# Altium PCB 球锁设置板改版20424.PCBDOC
Units mm, origin at the board's own origin, x right, y up, seen from the top; angles counter-clockwise.
Board outline 32 x 7.25 mm, 2 copper layers (Top, Bottom), stack 0.323 mm thick; 5 components, 4 nets, 11 pads, 4 vias.
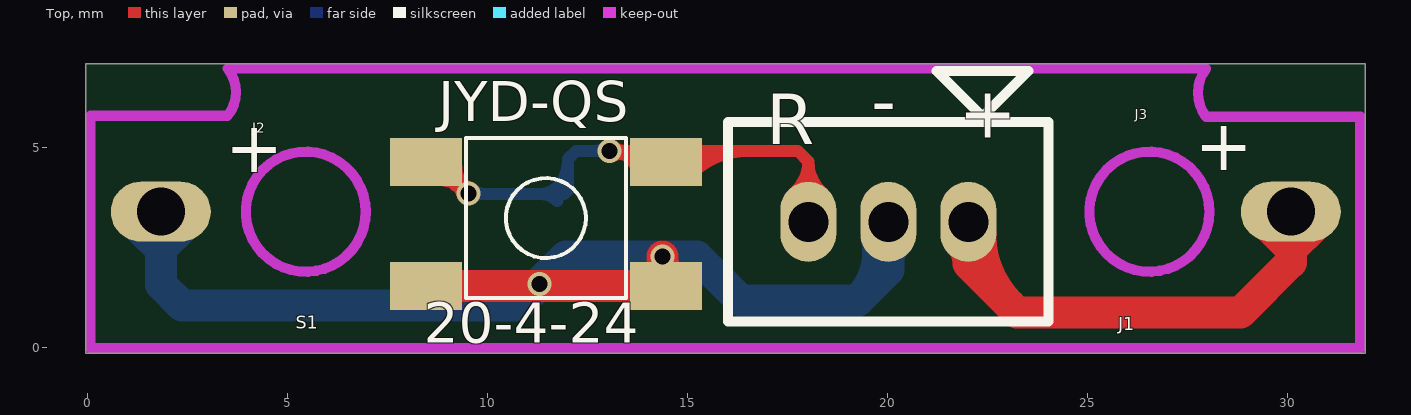
[diagram p0: Top view]
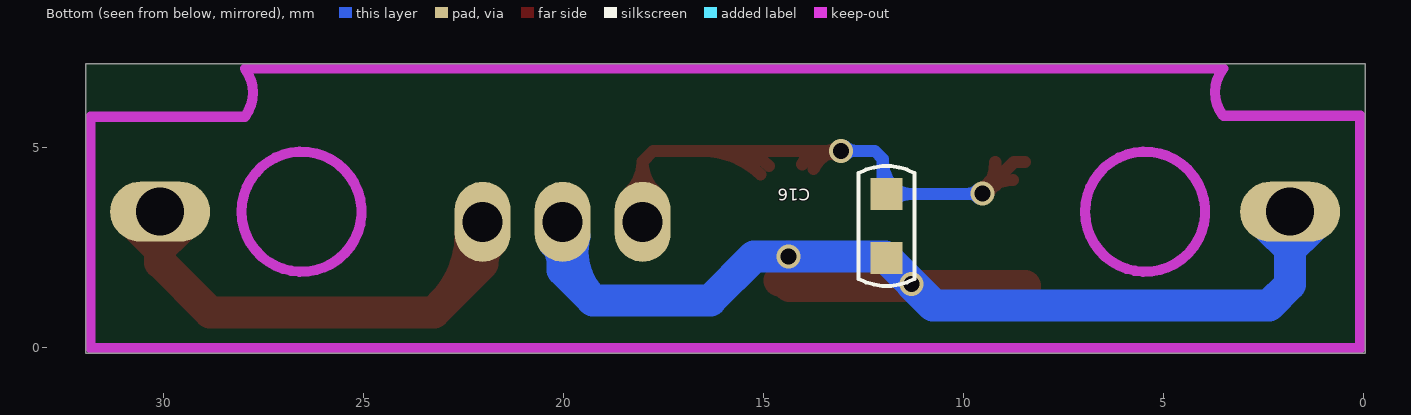
[diagram p1: Bottom view, seen from below]

## Layer stack, top to bottom
Top: signal copper 0.0343
Dielectric: core 0.254, FR-4, Dk 4.3
Bottom: signal copper 0.0343

## Board outline
-0.05,-0.134 31.947,-0.134 31.947,7.111 -0.05,7.111

## Design rules (kind name [scope] priority, off if disabled: settings)
Clearance [All] p1: gap=0.2
ComponentClearance [All] p1: gap=0 collisioncheckmode=3 verticalgap=0 showdistances=FALSE
FabricationTestPointUsage TestPointUsage [All] p1: valid=0 allowmultiple=FALSE
FabricationTestpoint Testpoint [All] p1: side=3 testpointundercomponent=TRUE minsize=1.016 maxsize=2.54 preferedsize=1.524 minholesize=0 maxholesize=1.016 preferedholesize=0.813 testpointgrid=0.025 allowsidetop=TRUE allowsidebottom=TRUE usegrid=TRUE gridtolerance=0
HoleSize [All] p1: absolutevalues=TRUE maxlimit=2.54 minlimit=0.254 maxpercent=80.000 minpercent=20.000
MinimumSolderMaskSliver [All] p1: minsoldermaskwidth=0
PlaneConnect "Power Plane Connect Style - from global settings" [All] p1: planeconnectstyle=Relief reliefexpansion=0.508 reliefentries=4 reliefconductorwidth=0.254 reliefairgap=0.254
PolygonConnect [All] p1: connectstyle=Relief reliefconductorwidth=0.305 reliefentries=4 polygonreliefangle="90 Angle" airgapwidth=0.254
RoutingVias [All] p1: holewidth=0.4 width=0.6 viastyle="Through Hole" minholewidth=0.4 minwidth=0.6 maxholewidth=0.4 maxwidth=0.6
SilkToSilkClearance [All] p1: silktosilkclearance=0
SilkToSolderMaskClearance SilkscreenOverComponentPads [IsPad] p1: minsilkscreentomaskgap=0 clearancetoexposedcopper=TRUE
SolderMaskExpansion [All] p1: expansion=0.102
Width [All] p1: maxlimit=1 minlimit=0.1 preferedwidth=0.254
20 further rules are at their usual default settings.

## Components (designator, comment, footprint, x,y, rotation, side; value= is the part's Value field where it differs from the comment)
C16 "C0603" C0603 11.92,3.05 r270 bottom
J1 "3PIN-2.0J" 3PIN-2.0J 20.019,3.154 r180 top
J2 "2P_2.54" 2P_2.54#1 1.831,4.131 r270 top
J3 "2P_2.54" 2P_2.54#2 30.081,1.539 r90 top
S1 "SW3" SW3 11.458,3.247 r180 top

## Footprints (in the part's own frame and the unit in brackets; to place one, negate y for a bottom-side part, rotate by r counter-clockwise, add the part's x,y. Pads: shape width x height; smd on the part's side, far side on the other; paste and mask are expansions set on the pad)
2P_2.54#1 [mm]
  oval 1.5x2.5 hole 1.2: 2(0.725,0)
2P_2.54#2 [mm]
  oval 1.5x2.5 hole 1.2: 2(1.867,0)
3PIN-2.0J [mm]
  oval 1.4x2 hole 1: 1(-2,0) 2(0,0) 3(2,0)
  silkscreen extent -4.01,-3.77 4.01,2.49
C0603 [mm]
  rect 0.8x0.8 smd: 1(-0.8,0) 2(0.8,0)
  silkscreen extent -1.5,-0.7 1.5,0.7
SW3 [mm]
  rect 1.8x1.2 smd: 1(-3,-1.403) 2(-3,1.697) 3(3,-1.403) 4(3,1.697)
  silkscreen extent -2,-2 2,2

## Via types
v1: diameter 0.6, hole 0.4, Top to Bottom, 4 vias

## Nets (pads, with @x,y where several pads share a name; then routed paths per layer and width w, separated by ;. In a path a pad name is that pad's centre, name@x,y a point inside that pad or via, vN(x,y) a via of type N, cw(c..) or ccw(c..) an arc to the next point about the centre after c; other vN are vias at no path point)
$$$7: J1.1 J3.2 | length 15.8
  Top w0.8: J1.1@21.807,2.642 cw(c21.295,2.13) 22.019,2.13 cw(c22.743,2.13) J1.1@22.231,2.642 ; J1.1 22.019,2.111 23.241,0.889 28.829,0.889 30.081,2.141 J3.2 ; J1.1@22.319,2.854 ccw(c24.837,2.854) 23.057,1.073 ; J3.2@29.834,3.159 cw(c29.236,2.561) 30.081,2.561 cw(c30.926,2.561) J3.2@30.328,3.159
$$$8: 
GND: C16.2 J1.2 J2.2 S1.2 S1.4 | length 34.9
  Top w0.8: S1.4 14.345,1.55 14.376,1.582 v1(14.376,2.286) ; v1@14.376,2.23 ccw(c15.138,2.23) S1.2@14.599,1.691
  Bottom w0.8: J2.2@1.584,3.159 cw(c0.986,2.561) 1.831,2.561 cw(c2.676,2.561) J2.2@2.078,3.159 ; J2.2 1.831,1.591 2.359,1.063 10.733,1.063 ; v1(11.303,1.6) 10.766,1.063 10.733,1.063 ; J1.2@19.726,2.788 cw(c18.049,2.408) 19.265,1.192 ; J1.2@19.807,2.642 cw(c19.295,2.13) 20.019,2.13 cw(c20.743,2.13) J1.2@20.231,2.642 ; J1.2 20.019,1.946 19.265,1.192 ; 10.733,1.063 C16.2 11.956,2.286 v1(14.376,2.286) 15.232,2.286 16.326,1.192 19.265,1.192
SWDIO/INIT_KEY: C16.1 J1.3 S1.1 S1.3 | length 25.6
  Top w0.305: S1.3 8.736,4.65 v1(9.525,3.861) cw(c10.296,4.632) S1.3@9.206,4.645 ; S1.3@8.758,4.202 cw(c8.758,3.175) v1@9.484,3.902 ; S1.3@9.193,4.07 cw(c8.989,3.717) v1@9.382,3.823 ; 9.255,4.034 ccw(c9.408,4.298) v1@9.487,4.003 ; v1@9.377,3.861 ccw(c9.021,3.861) 9.273,4.113 ccw(c9.525,4.365) v1@9.525,4.008 ; v1@9.382,3.899 ccw(c9.038,3.991) 9.347,4.169 ccw(c9.655,4.348) v1@9.563,4.003 ; v1@13.129,4.8 cw(c13.308,4.491) 13.4,4.835 cw(c13.492,5.18) v1@13.183,5.001 ; v1@13.16,4.823 cw(c13.412,4.571) 13.412,4.928 cw(c13.412,5.284) v1@13.16,5.032 ; 13.519,4.928 cw(c13.519,4.375) S1.1@14.027,4.593 ; S1.1@13.747,4.473 ccw(c13.056,4.175) v1(13.056,4.928) 17.755,4.928 18.019,4.663 ; S1.1@14.859,4.549 cw(c15.773,3.635) 15.773,4.928 ; S1.1@15.074,4.334 cw(c16.509,2.899) 16.509,4.928 ; J1.3@17.658,3.866 ccw(c16.958,4.663) 18.019,4.663 ; J1.3 18.019,4.663 ; J1.3@18.38,3.866 cw(c19.08,4.663) 18.019,4.663
  Bottom w0.305: v1(9.525,3.861) 9.536,3.85 C16.1 12.014,3.944 12.014,4.724 12.217,4.928 v1(13.056,4.928) ; v1@9.629,3.756 cw(c9.855,3.531) 9.855,3.85 ; v1@9.629,3.965 ccw(c9.907,4.243) 9.907,3.85 ; C16.1@11.745,3.675 ccw(c11.322,3.252) 11.322,3.85 ccw(c11.322,4.448) 11.745,4.025 ccw(c11.095,4.675) 12.014,4.675 ; C16.1@11.939,3.881 C16.1@11.942,3.879 ; v1@12.951,4.823 ccw(c12.699,4.571) 12.699,4.928 ccw(c12.699,5.284) v1@12.951,5.032

## Keep-outs
Keep-Out Layer:
  circle w0.254: c26.547,3.406 r1.5
  circle w0.254: c5.457,3.406 r1.5
  lines w0.254: 27.961,5.781 cw(c28.761,6.382) 27.961,6.984 ; 27.961,5.781 31.82,5.781 31.82,-0.007 0.077,-0.007 0.077,5.804 3.5,5.804 ccw(c2.782,6.394) 3.5,6.984 27.961,6.984

## Other copper
Top:
  region net $$$7: 30.099,1.905 31.242,3.048 30.226,4.064 29.083,2.921
Bottom:
  region net GND: 1.831,1.905 2.948,3.021 1.905,4.064 0.789,2.948

## Silkscreen, mask and mechanical layers (free items; w line width, h text height)
Silkscreen Top:
  text "JYD-QS" at 8.763,5.664 h1
  text "-" at 19.59,5.555 h1.27
  text "+" at 21.779,5.258 h1.27
  text "R" at 16.97,5.096 h1.27
  text "+" at 27.686,4.445 h1.27
  text "+" at 3.442,4.389 h1.27
  text "20-4-24" at 8.407,0.127 h1
Drill Drawing:
  lines w0.025: 0,2.899 0.001,2.899 ; 15.73,6.984 15.731,6.984 ; 16.004,-0.007 16.004,-0.007 ; 31.82,2.887 31.821,2.887 ; 0.077,2.899 0.078,2.899